# Altium PCB MCU_Boardfor traning.PcbDoc
Units mm, origin at the board's own origin, x right, y up, seen from the top; angles counter-clockwise.
Board outline 126.62 x 88.77 mm, 2 copper layers (Top Layer, Bottom Layer); 43 components, 56 nets, 187 pads, 13 vias.
Unrouted connection lines stored in the file: 3.
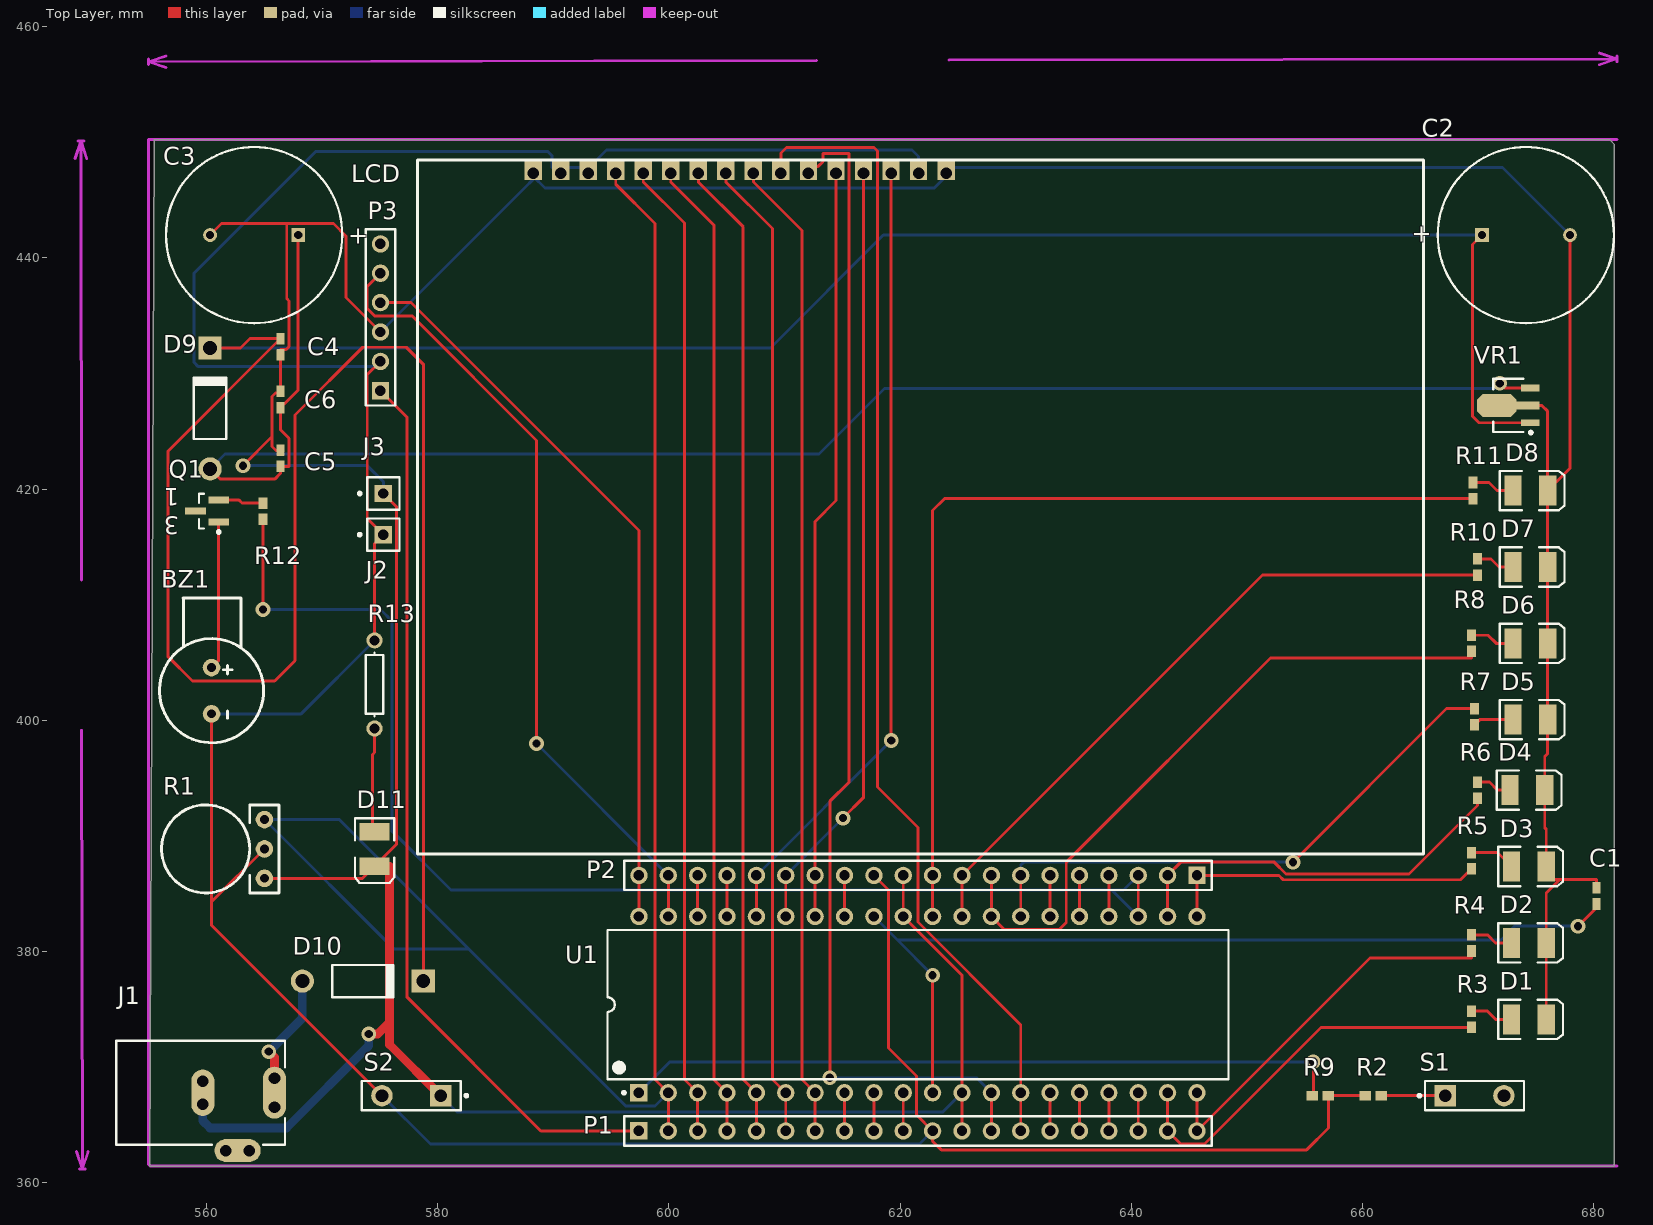
[diagram p0: Top Layer view]
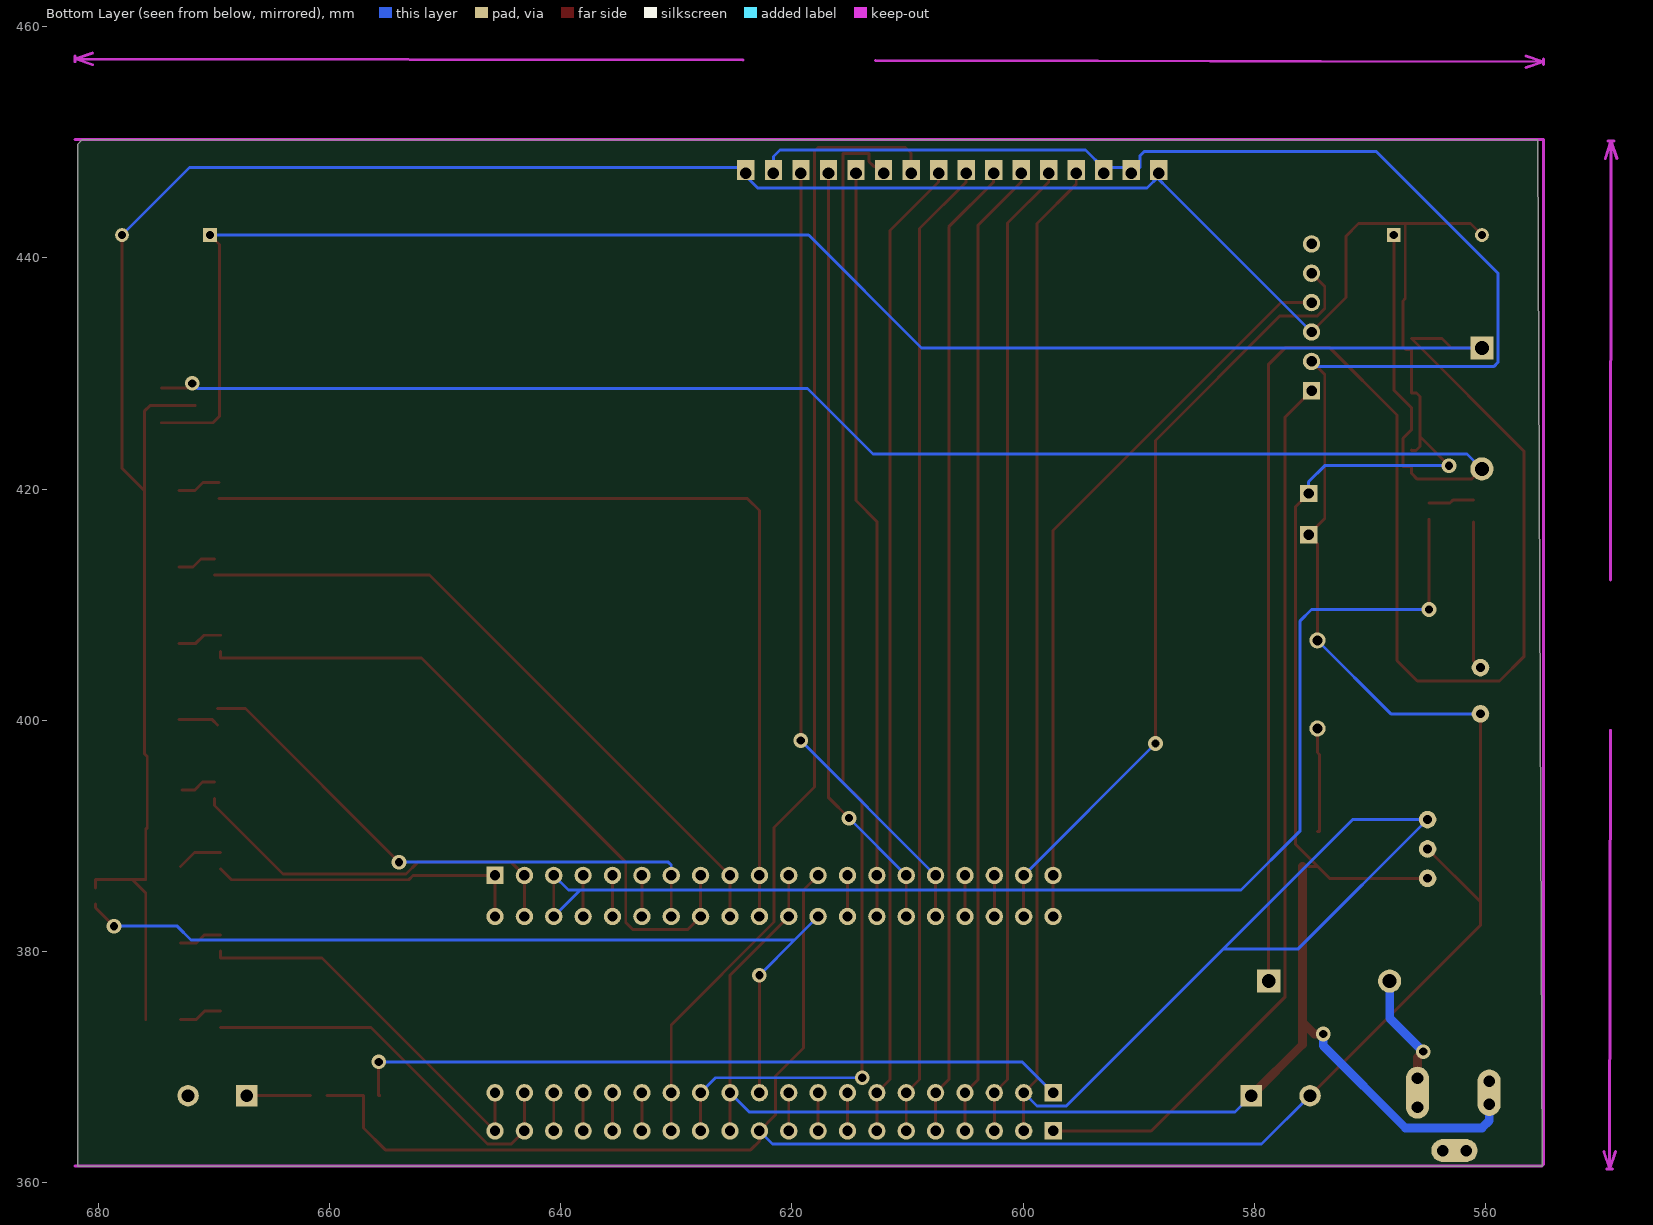
[diagram p1: Bottom Layer view, seen from below]

## Layer stack, top to bottom
Top Layer: signal copper 0.0356
Dielectric: dielectric 0.32, FR-4, Dk 4.8
Bottom Layer: signal copper 0.0356

## Board outline
555.498,450.215 681.355,450.215 681.736,449.834 681.736,361.442 555.117,361.442

## Design rules (kind name [scope] priority, off if disabled: settings)
Clearance [All] p1: gap=0.254
FabricationTestPointUsage TestPointUsage [All] p1: valid=0 allowmultiple=FALSE
FabricationTestpoint Testpoint [All] p1: side=3 testpointundercomponent=TRUE minsize=1.016 maxsize=2.54 preferedsize=1.524 minholesize=0 maxholesize=1.016 preferedholesize=0.813 testpointgrid=0.025 allowsidetop=TRUE allowsidebottom=TRUE usegrid=TRUE gridtolerance=0
HoleSize [All] p1: absolutevalues=TRUE maxlimit=5.08 minlimit=0.025 maxpercent=80.000 minpercent=20.000
MinimumSolderMaskSliver [All] p1: minsoldermaskwidth=0.127
PolygonConnect [All] p1: connectstyle=Relief reliefconductorwidth=0.254 reliefentries=4 polygonreliefangle="90 Angle" airgapwidth=0.254
RoutingVias [All] p1: holewidth=0.711 width=1.27 viastyle="Through Hole" minholewidth=0.711 minwidth=1.27 maxholewidth=0.711 maxwidth=1.27
SilkToSolderMaskClearance SilkscreenOverComponentPads [IsPad] p1: minsilkscreentomaskgap=0.038 clearancetoexposedcopper=TRUE
SolderMaskExpansion [All] p1: expansion=0.102
Width [All] p1: maxlimit=2.54 minlimit=0.254 preferedwidth=0.254
23 further rules are at their usual default settings.

## Classes and differential pairs
component class MCU: BZ1 C1 D1 D2 D3 D4 D5 D6 D7 D8 LCD P1 P2 Q1 R1 R2 R3 R4 R5 R6 R7 R8 R9 R10 R11 R12 S1 S2 U1
component class POWER: C2 C3 C4 C5 C6 D9 D10 D11 J1 J2 J3 P3 R13 VR1

## Components (designator, comment, footprint, x,y, rotation, side; value= is the part's Value field where it differs from the comment)
BZ1 "GT-0950RP3" Buzzer 560.451,400.558 r90 top
C1 "Cap" CAPC1005M 680.212,384.81 r270 top
C2 "Cap Pol1" RB7.6-15 674.116,441.96 r180 top
C3 "Cap Pol1" RB7.6-15 564.134,441.96 r0 top
C4 "Cap" CAPC1005M 566.42,432.308 r90 top
C5 "Cap" CAPC1005M 566.42,422.656 r270 top
C6 "Cap" CAPC1005M 566.42,427.736 r270 top
D1 "LED3" 3.5X2.8X1.9 674.37,374.142 r0 top
D2 "LED3" 3.5X2.8X1.9 674.37,380.746 r0 top
D3 "LED3" 3.5X2.8X1.9 674.37,387.35 r0 top
D4 "LED3" 3.5X2.8X1.9 674.243,393.954 r0 top
D5 "LED3" 3.5X2.8X1.9 674.497,400.05 r0 top
D6 "LED3" 3.5X2.8X1.9 674.497,406.654 r0 top
D7 "LED3" 3.5X2.8X1.9 674.497,413.258 r0 top
D8 "LED3" 3.5X2.8X1.9 674.497,419.862 r0 top
D9 "Diode 1N4001" DO-41 560.324,426.974 r90 top
D10 "Diode 1N4001" DO-41 573.532,377.444 r0 top
D11 "LED3" 3.5X2.8X1.9 574.548,388.874 r270 top
J1 "PWR2.5" KLD-0202 552.196,367.792 r0 top
J2 "Socket" PIN1 575.31,416.052 r90 top
J3 "Socket" PIN1 575.31,419.608 r90 top
LCD "LCD16x4" PCBComponent_1 588.264,447.294 r0 top
P1 "Header 20" HDR1X20 597.408,364.49 r0 top
P2 "Header 20" HDR1X20 645.668,386.588 r180 top
P3 "Header 6" HDR1X6 575.056,428.498 r90 top
Q1 "NPN" SOT23-3M 560.07,418.084 r180 top
R1 "Res pot" RPOT 565.023,386.334 r90 top
R2 "Res1" RESC1005M 660.908,367.538 r0 top
R3 "Res1" RESC1005M 669.417,374.142 r90 top
R4 "Res1" RESC1005M 669.417,380.746 r90 top
R5 "Res1" RESC1005M 669.417,387.858 r90 top
R6 "Res1" RESC1005M 669.925,393.954 r90 top
R7 "Res1" RESC1005M 669.671,400.304 r270 top
R8 "Res1" RESC1005M 669.417,406.654 r90 top
R9 "Res1" RESC1005M 656.336,367.538 r0 top
R10 "Res1" RESC1005M 669.925,413.258 r90 top
R11 "Res1" RESC1005M 669.544,419.862 r90 top
R12 "Res1" RESC1005M 564.896,418.084 r270 top
R13 "Res1" AXIAL-0.3 574.548,403.098 r270 top
S1 "SW-PB" SPST-2 669.671,367.538 r0 top
S2 "Reset" SPST-2 577.723,367.538 r180 top
U1 "PIC18F45K20-E/P" PDIP600-P40 621.538,375.412 r90 top
VR1 "Volt Reg" SOT89M 672.592,427.228 r180 top

## Footprints (in the part's own frame and the unit in brackets; to place one, negate y for a bottom-side part, rotate by r counter-clockwise, add the part's x,y. Pads: shape width x height; smd on the part's side, far side on the other; paste and mask are expansions set on the pad)
3.5X2.8X1.9 [mm] "SM LED; 2 C-Bend Leads; Body 3.5 x 2.8 x 1.9 mm, inc leads (LxWxH typ)"
  rect 1.5x2.6 smd: 1(-1.5,0) 2(1.5,0)
  silkscreen extent -2.65,-1.7 2.95,1.7
AXIAL-0.3 [mm] "Resistor; 2 Leads"
  round 1.4 hole 0.85: 1(-3.81,0) 2(3.81,0)
  silkscreen extent -2.77,-0.76 2.77,0.76
Buzzer [mil]
  round 60 hole 30: 1(0,0) 2(157.48,0)
  silkscreen extent -98,-177 395,177, body extent -95,-177 400,177, height 122
CAPC1005M [mm] "Chip Capacitor, Body 1.0x0.5mm, IPC Low Density"
  rect 1x0.7 smd: 1(-0.7,0) 2(0.7,0)
  body extent -0.55,-0.3 0.55,0.3, height 0.6
DO-41 [mm] "Diode, Axial; Body 5.2 x 2.7 mm (LxDia. max), Lead Dia. 0.86 mm (max)"
  round 2 hole 1.2: 1(-5.23,0)
  rect 2x2 hole 1.2: 2(5.23,0)
  silkscreen extent -2.65,-1.41 2.75,1.4
HDR1X6 [mm] "Connector; Header; 6 Position"
  rect 1.5x1.5 hole 0.9: 1(0,0)
  round 1.5 hole 0.9: 2(2.54,0) 3(5.08,0) 4(7.62,0) 5(10.16,0) 6(12.7,0)
  silkscreen extent -1.27,-1.27 13.97,1.27
HDR1X20 [mm] "Connector; Header; 20 Position"
  rect 1.5x1.5 hole 0.9: 1(0,0)
  round 1.5 hole 0.9: 2(2.54,0) 3(5.08,0) 4(7.62,0) 5(10.16,0) 6(12.7,0) 7(15.24,0) 8(17.78,0) 9(20.32,0) 10(22.86,0) 11(25.4,0) 12(27.94,0) 13(30.48,0) 14(33.02,0) 15(35.56,0) 16(38.1,0) 17(40.64,0) 18(43.18,0) 19(45.72,0) 20(48.26,0)
  silkscreen extent -1.27,-1.27 49.53,1.27
KLD-0202 [mm] "DC Power Jack, 2.5mm, KLD Series, PCB Mount"
  oval 2x4.5 all layers, no hole: 1(13.7,0)
  round 1.5 hole 1: 1A(13.7,-1.25) 1B(13.7,1.25) 2A(7.5,-1) 2B(7.5,1) 3A(9.5,-5) 3B(11.5,-5)
  oval 2x4 all layers, no hole: 2(7.5,0)
  oval 4x2 all layers, no hole: 3(10.5,-5)
  silkscreen extent 0,-4.5 14.6,4.5
PCBComponent_1 [mm]
  rect 1.5x1.7 hole 1 copper offset 0,0.3: 1(0,0) 2(2.381,0) 3(4.762,0) 4(7.143,0) 5(9.519,0) 6(11.899,0) 7(14.28,0) 8(16.661,0) 9(19.042,0) 10(21.423,0) 11(23.804,0) 12(26.185,0) 13(28.566,0) 14(30.947,0) 15(33.328,0) 16(35.709,0)
  silkscreen extent -10,-58.86 77,1.14
PDIP600-P40 [mm] "DIP, 40-Leads, Row Spacing 15.24mm, Pitch 2.54mm, Body 51.8x13.5mm"
  rect 1.5x1.5 hole 0.9: 1(-7.62,24.13)
  round 1.5 hole 0.9: 2(-7.62,21.59) 3(-7.62,19.05) 4(-7.62,16.51) 5(-7.62,13.97) 6(-7.62,11.43) 7(-7.62,8.89) 8(-7.62,6.35) 9(-7.62,3.81) 10(-7.62,1.27) 11(-7.62,-1.27) 12(-7.62,-3.81) 13(-7.62,-6.35) 14(-7.62,-8.89) 15(-7.62,-11.43) 16(-7.62,-13.97) 17(-7.62,-16.51) 18(-7.62,-19.05) 19(-7.62,-21.59) 20(-7.62,-24.13) 21(7.62,-24.13) 22(7.62,-21.59) 23(7.62,-19.05) 24(7.62,-16.51) 25(7.62,-13.97) 26(7.62,-11.43) 27(7.62,-8.89) 28(7.62,-6.35) 29(7.62,-3.81) 30(7.62,-1.27) 31(7.62,1.27) 32(7.62,3.81) 33(7.62,6.35) 34(7.62,8.89) 35(7.62,11.43) 36(7.62,13.97) 37(7.62,16.51) 38(7.62,19.05) 39(7.62,21.59) 40(7.62,24.13)
  silkscreen extent -7.74,-26.85 6.45,26.85, body extent -7.3,-26.85 7.3,26.85, height 6.35
PIN1 [mm] "Connector; Plug"
  rect 1.5x1.5 hole 0.9: 1(0,0)
  silkscreen extent -1.4,-1.4 1.4,2.17
RB7.6-15 [mm] "Polarized Capacitor (Radial); 2 Leads"
  rect 1.2x1.2 hole 0.7: 1(3.81,0)
  round 1.2 hole 0.7: 2(-3.81,0)
  silkscreen extent -7.62,-7.62 7.62,7.62
RESC1005M [mm] "Chip Resistor, Body 1.1x0.5mm, IPC Low Density"
  rect 1x0.8 smd: 1(-0.7,0) 2(0.7,0)
  body extent -0.55,-0.3 0.55,0.3, height 0.4
RPOT [mil]
  round 60 hole 30: 1(0,0) 2(100,0) 3(200,0)
  silkscreen extent -50,-50 250,350, body extent -50,-50 250,349, height 100
SOT23-3M [mm] "SOT23, 3-Leads, Body 2.9x1.3mm, Pitch 0.95mm, Lead Span 2.5mm, IPC Low Density"
  rect 1.8x0.6 smd: 1(-1,0.95) 2(-1,-0.95) 3(1,0)
  silkscreen extent -1.13,-1.5 0.7,1.92, body extent -0.7,-1.5 0.7,1.5, height 1.1
SOT89M [mm] "SOT89, 3-Leads, Body 4.5x2.4 mm, Pitch 1.5mm, Lead Span 4.1mm, IPC Low Density"
  rect 1.6x0.6 smd: 1(-1.9,1.5) 3(-1.9,-1.5)
  rect 2x0.7 smd: 2(-1.7,0)
  oct 3.4x2 smd: 2(1,0)
  silkscreen extent -2.07,-2.3 1.3,2.47, body extent -1.3,-2.3 1.3,2.3, height 1.6
SPST-2 [mm] "Circuit Breaker; 2 Leads"
  rect 1.85x1.85 hole 1.1: 1(-2.54,0)
  round 1.85 hole 1.1: 2(2.54,0)
  silkscreen extent -4.89,-1.27 4.28,1.27

## Part data
BZ1: library part Buzzer, "AUDIO MAGNETICXDCR"
C1 C4 C5 C6: "CAP CER 0.1uF 50V 0805"
C2 C3: "Polarized Capacitor (Radial)"
D1 D2 D3 D4 D5 D6 D7 D8 D11: "Typical BLUE SiC LED"
D9 D10: "1 Amp General Purpose Rectifier"
J1: "Low Voltage Power Supply Connector"
P1 P2: "Header, 20-Pin"
P3: "Header, 6-Pin"
Q1: "NPN Bipolar Transistor"
R1: library part "Res Tap", "Tapped Resistor"
R2 R3 R4 R5 R6 R7 R8 R9 R10 R11 R12: "Resistor 10k 5% 1/8W 8050"
R13: "Resistor"
S1: "Switch"
S2: library part SW-PB, "Switch"
U1: "Flash Microcontroller with 10-Bit A/D and nanoWatt Technology, 32K Flash, 40-Pin PDIP, Extended Temperature Range"
VR1: "Voltage Regulator"

## Via types
v1: diameter 1.27, hole 0.711, Top Layer to Bottom Layer, 13 vias

## Nets (pads, with @x,y where several pads share a name; then routed paths per layer and width w, separated by ;. In a path a pad name is that pad's centre, name@x,y a point inside that pad or via, vN(x,y) a via of type N, cw(c..) or ccw(c..) an arc to the next point about the centre after c; other vN are vias at no path point)
GND: C1.1 C2.2 C3.2 C4.1 C5.1 C6.1 D1.2 D2.2 D3.2 D4.2 D5.2 D6.2 D7.2 D8.2 D11.2 J1.2A J1.2B J3.1 LCD.1 LCD.16 P1.12 P2.11 P3.3 R1.1 S2.1 U1.12 U1.31 VR1.2 | length 419.2
  Top Layer w0.254: C3.2 561.315,442.951 566.953,442.951 ; v1(563.169,422.021) 565.683,424.536 ; R1.1 573.508,386.334 D11.2 ; C5.1 566.42,423.342 566.014,423.342 565.683,423.672 565.683,424.536 ; P3.3 572.084,436.55 572.084,441.858 570.992,442.951 566.953,442.951 ; J3.1 576.453,418.465 576.453,389.279 D11.2 ; D11.2@575.843,387.374 D11.2 ; P2.11 U1.31 625.348,377.952 U1.12 P1.12 ; VR1.2@671.592,427.228 674.292,427.228 675.488,427.228 675.997,426.719 D8.2 ; D1.2 D2.2 675.87,385.064 677.038,386.232 ; C2.2 677.926,421.791 D8.2 ; C1.1 680.212,386.232 677.038,386.232 ; 565.683,424.536 565.683,427.99 565.988,428.295 566.42,428.295 C6.1 C4.1 566.42,432.054 566.903,432.054 567.157,432.308 567.157,436.27 566.953,436.474 566.953,442.951 ; D8.2 D7.2 D6.2 D5.2 675.997,397.129 675.743,396.875 D4.2 675.743,390.703 675.87,390.576 D3.2 675.87,386.232 677.038,386.232
  Top Layer w0.762: v1(574.04,372.872) 574.827,372.872 575.843,373.888 ; D11.2@575.843,387.374 575.843,373.888 ; S2.1 575.843,371.958 575.843,373.888
  Bottom Layer w0.254: v1(563.169,422.021) 573.913,422.021 575.31,420.624 J3.1 ; P3.3 587.502,446.024 588.264,446.786 LCD.1@588.264,447.04 ; S2.1 581.672,366.129 623.685,366.129 U1.12 ; LCD.1@588.264,447.802 LCD.1@588.264,447.04 ; C2.2 672.084,447.802 623.973,447.802 623.973,447.04 622.957,446.024 589.28,446.024 LCD.1@588.264,447.04
  Bottom Layer w0.762: J1.2A 559.696,365.372 560.324,364.744 566.928,364.744 574.04,371.856 v1(574.04,372.872)
NetBZ1_2: BZ1.2 Q1.1 | length 12.8
  Top Layer w0.254: BZ1.2 561.07,405.177 Q1.1
NetC1_2: C1.2 U1.11 U1.32 | length 79.3
  Top Layer w0.254: U1.11 v1(622.808,377.952) ; v1(678.612,382.194) 680.212,383.794 C1.2
  Bottom Layer w0.254: U1.32 619.76,381 ; v1(622.808,377.952) 619.76,381 ; v1(678.612,382.194) 673.151,382.194 671.957,381 619.76,381
NetC2_1: C2.1 C4.2 D9.2 D10.2 VR1.1 | length 274.5
  Top Layer w0.254: D9.2 562.966,432.204 563.77,433.008 C4.2 556.666,423.254 556.666,405.536 558.8,403.403 565.912,403.403 567.665,405.155 567.665,426.39 573.532,432.257 577.291,432.257 578.762,430.786 D10.2 ; C2.1 669.493,441.147 669.493,426.287 670.052,425.728 VR1.1
  Bottom Layer w0.254: D9.2 608.785,432.204 618.541,441.96 C2.1
NetC3_1: C3.1 C5.2 C6.2 D9.1 VR1.3 | length 146.4
  Top Layer w0.254: D9.1 561.215,420.853 565.912,420.853 566.42,421.361 C5.2@566.42,421.945 ; C5.2 C5.2@566.42,421.945 ; C3.1 567.944,428.56 C6.2 566.42,425.12 567.157,424.383 567.157,421.945 C5.2@566.42,421.945 ; v1(671.855,429.133) 672.26,428.728 VR1.3
  Bottom Layer w0.254: D9.1 561.617,423.037 612.978,423.037 618.642,428.701 671.424,428.701 v1(671.855,429.133)
NetD1_1: D1.1 R3.2 | length 3.7
  Top Layer w0.254: R3.2 670.789,374.842 671.489,374.142 D1.1
NetD2_1: D2.1 R4.2 | length 3.7
  Top Layer w0.254: R4.2 670.789,381.446 671.489,380.746 D2.1
NetD3_1: D3.1 R5.2 | length 4
  Top Layer w0.254: R5.2 671.662,388.558 D3.1
NetD4_1: D4.1 R6.2 | length 3.1
  Top Layer w0.254: R6.2 670.966,394.654 671.666,393.954 D4.1
NetD5_1: D5.1 R7.2 | length 3.5
  Top Layer w0.254: R7.2 670.117,400.05 D5.1
NetD6_1: D6.1 R8.2 | length 3.9
  Top Layer w0.254: R8.2 670.839,407.354 671.539,406.654 D6.1
NetD7_1: D7.1 R10.2 | length 3.4
  Top Layer w0.254: R10.2 671.093,413.958 671.793,413.258 D7.1
NetD8_1: D8.1 R11.2 | length 3.7
  Top Layer w0.254: R11.2 670.916,420.562 671.616,419.862 D8.1
NetD10_1: D10.1 J1.1A J1.1B | length 9.8
  Top Layer w0.762: v1(565.404,371.348) 565.896,370.856 J1.1B
  Bottom Layer w0.762: v1(565.404,371.348) 568.302,374.246 D10.1
NetD11_1: D11.1 R13.2 | length 9.1
  Top Layer w0.254: D11.1 574.388,390.374 574.388,397.044 574.548,397.205 R13.2
NetJ1_3A: J1.3A J1.3B
NetLCD_4: LCD.4 P1.2 R1.3 U1.2 | length 153.1
  Top Layer w0.254: LCD.4@595.407,447.802 595.407,446.349 598.805,442.951 598.805,368.935 U1.2 P1.2
  Bottom Layer w0.254: U1.2 598.805,366.649 596.265,366.649 582.676,380.238 ; 582.676,380.238 571.5,391.414 R1.3 576.199,380.238 582.676,380.238
NetLCD_5: LCD.5 P1.3 U1.3 | length 85.3
  Top Layer w0.254: LCD.5@597.783,447.802 597.783,446.557 601.345,442.995 601.345,368.935 U1.3 P1.3
NetLCD_6: LCD.6 P1.4 U1.4 | length 85.3
  Top Layer w0.254: LCD.6@600.163,447.802 600.163,446.557 603.885,442.836 603.885,368.935 U1.4 P1.4
NetLCD_7: LCD.7 P1.5 U1.5 | length 85.4
  Top Layer w0.254: LCD.7@602.544,447.802 602.544,446.557 606.425,442.677 606.425,368.935 U1.5 P1.5
NetLCD_8: LCD.8 P1.6 U1.6 | length 85.5
  Top Layer w0.254: LCD.8@604.925,447.802 604.925,446.557 608.965,442.517 608.965,368.935 U1.6 P1.6
NetLCD_9: LCD.9 P1.7 U1.7 | length 85.5
  Top Layer w0.254: LCD.9@607.306,447.802 607.306,446.557 611.505,442.358 611.505,368.935 U1.7 P1.7
NetLCD_10: LCD.10 P1.14 U1.14 | length 99.8
  Top Layer w0.254: LCD.10@609.687,447.802 609.687,449.047 610.182,449.541 617.728,449.541 618.033,449.236 618.033,394.233 621.538,390.728 621.538,382.549 630.428,373.659 U1.14 P1.14
NetLCD_11: LCD.11 P1.13 U1.13 | length 103
  Top Layer w0.254: LCD.11@612.068,447.802 612.068,447.904 612.912,447.904 613.318,448.31 613.318,449.033 615.594,449.033 615.594,394.665 613.918,392.989 v1(613.918,369.087) ; P1.13 U1.13
  Bottom Layer w0.254: v1(613.918,369.087) 626.593,369.087 U1.13
NetLCD_12: LCD.12 P2.14 U1.34 | length 65.5
  Top Layer w0.254: U1.34 P2.14 612.648,417.195 614.449,418.996 LCD.12@614.449,447.802
NetLCD_13: LCD.13 P2.15 U1.35 | length 67.6
  Top Layer w0.254: U1.35 P2.15 ; v1(615.061,391.541) 616.814,393.294 616.814,447.802 LCD.13@616.83,447.802
  Bottom Layer w0.254: P2.15 v1(615.061,391.541)
NetLCD_14: LCD.14 P2.16 U1.36 | length 69.6
  Top Layer w0.254: U1.36 P2.16 ; LCD.14@619.211,447.802 619.211,398.262 v1(619.227,398.247)
  Bottom Layer w0.254: P2.16 v1(619.227,398.247)
NetP1_1: P1.1 P3.1 | length 78.2
  Top Layer w0.254: P3.1 577.367,426.187 577.367,376.047 588.924,364.49 P1.1
NetP1_8: P1.8 U1.8 | length 3.3
  Top Layer w0.254: P1.8 U1.8
NetP1_9: P1.9 U1.9 | length 3.3
  Top Layer w0.254: P1.9 U1.9
NetP1_10: P1.10 U1.10 | length 3.3
  Top Layer w0.254: P1.10 U1.10
NetP1_15: P1.15 U1.15 | length 3.3
  Top Layer w0.254: P1.15 U1.15
NetP1_16: P1.16 U1.16 | length 3.3
  Top Layer w0.254: P1.16 U1.16
NetP1_17: P1.17 U1.17 | length 3.3
  Top Layer w0.254: P1.17 U1.17
NetP1_18: P1.18 U1.18 | length 3.3
  Top Layer w0.254: P1.18 U1.18
NetP1_19: P1.19 R3.1 U1.19 | length 34.2
  Top Layer w0.254: U1.19 P1.19 644.259,363.359 646.315,363.359 656.387,373.431 669.417,373.431 R3.1
NetP1_20: P1.20 R4.1 U1.20 | length 33.8
  Top Layer w0.254: U1.20 P1.20 660.629,379.451 669.417,379.451 R4.1
NetP2_1: P2.1 R5.1 U1.21 | length 27.9
  Top Layer w0.254: U1.21 P2.1 652.755,386.588 653.136,386.207 668.466,386.207 R5.1
NetP2_2: P2.2 R6.1 U1.22 | length 34.3
  Top Layer w0.254: U1.22 P2.2 644.271,387.731 652.348,387.731 653.364,386.715 664.007,386.715 669.925,392.633 R6.1
NetP2_3: P2.3 R12.2 U1.23 | length 111.5
  Top Layer w0.254: v1(564.896,409.575) R12.2 ; U1.23 P2.3
  Bottom Layer w0.254: v1(564.896,409.575) 575.056,409.575 576.072,408.559 576.072,390.398 581.152,385.318 638.302,385.318 ; U1.23 638.302,385.318 ; P2.3 639.318,385.318 638.302,385.318
NetP2_4: P2.4 U1.24 | length 3.6
  Top Layer w0.254: U1.24 P2.4
NetP2_5: P2.5 U1.25 | length 3.6
  Top Layer w0.254: U1.25 P2.5
NetP2_6: P2.6 U1.26 | length 3.6
  Top Layer w0.254: U1.26 P2.6
NetP2_7: P2.7 R7.1 U1.27 | length 49.3
  Top Layer w0.254: U1.27 P2.7 ; v1(653.974,387.731) 667.258,401.015 669.671,401.015 R7.1
  Bottom Layer w0.254: P2.7 630.428,387.477 630.682,387.731 v1(653.974,387.731)
NetP2_8: P2.8 R8.1 U1.28 | length 58.9
  Top Layer w0.254: P2.8 U1.28 629.031,381.889 633.73,381.889 634.365,382.524 634.365,387.731 652.018,405.384 669.417,405.384 R8.1
NetP2_9: P2.9 R10.1 U1.29 | length 58.9
  Top Layer w0.254: U1.29 P2.9 651.332,412.572 669.925,412.572 R10.1
NetP2_10: P2.10 R11.1 U1.30 | length 82.3
  Top Layer w0.254: U1.30 P2.10 622.808,418.146 623.824,419.162 R11.1
NetP2_13: P2.13 U1.33 | length 3.6
  Top Layer w0.254: U1.33 P2.13
NetP2_17: P2.17 U1.37 | length 3.6
  Top Layer w0.254: U1.37 P2.17
NetP2_18: P2.18 U1.38 | length 3.6
  Top Layer w0.254: U1.38 P2.18
NetP2_19: P2.19 P3.5 U1.39 | length 68.8
  Top Layer w0.254: P3.5 573.913,437.515 573.913,435.61 574.548,434.975 577.774,434.975 588.543,424.205 v1(588.543,397.993) ; U1.39 P2.19
  Bottom Layer w0.254: v1(588.543,397.993) P2.19
NetP2_20: P2.20 P3.4 U1.40 | length 63.9
  Top Layer w0.254: P3.4 577.698,436.118 597.408,416.408 P2.20 U1.40
NetQ1_2: Q1.2 R12.1 | length 3.9
  Top Layer w0.254: Q1.2 562.839,419.034 563.089,418.784 R12.1
NetR2_2: R2.2 S1.1 | length 5.5
  Top Layer w0.254: R2.2 S1.1
NetR9_1: R9.1 U1.1 | length 62.4
  Top Layer w0.254: R9.1 655.726,367.538 v1(655.726,370.459)
  Bottom Layer w0.254: U1.1 600.075,370.459 v1(655.726,370.459)
VCC: BZ1.1 J2.1 LCD.2 LCD.3 LCD.15 P1.11 P2.12 P3.2 R1.2 R2.1 R9.2 R13.1 S2.2 | length 299.6
  Top Layer w0.254: BZ1.1 560.451,384.302 ; R1.2 560.451,384.302 ; R13.1 574.548,415.29 J2.1 573.913,417.449 573.913,429.895 P3.2 ; S2.2 560.451,382.27 560.451,384.302 ; P2.12 618.998,385.318 618.998,371.653 621.411,369.24 621.411,365.887 P1.11 622.808,363.601 623.558,362.851 655.154,362.851 657.047,364.744 R9.2@657.047,367.538 ; R9.2 R9.2@657.047,367.538 ; R2.1 R9.2@657.047,367.538
  Bottom Layer w0.254: BZ1.1 568.198,400.558 R13.1 ; P3.2 574.599,430.581 559.308,430.581 558.927,430.962 558.927,438.658 569.443,449.174 589.534,449.174 589.89,448.818 589.89,447.802 LCD.3@593.026,447.802 ; S2.2 579.374,363.347 621.665,363.347 P1.11 ; LCD.3 593.026,447.738 594.614,449.326 621.03,449.326 621.592,448.764 LCD.15 LCD.15@621.592,446.865
pads on no net: J1.1 J1.2 J1.3 P3.6 Q1.3 S1.2

## Keep-outs
Keep-Out Layer:
  lines w0.254: 548.642,448.563 549.148,450.088 ; 548.765,362.711 549.275,361.188 ; 548.894,450.088 549.402,450.088 ; 549.021,361.188 549.529,361.188 ; 549.202,412.138 549.148,450.088 ; 549.221,399.138 549.275,361.188 ; 549.658,448.565 549.148,450.088 ; 549.781,362.713 549.275,361.188 ; 554.99,361.569 554.99,450.215 681.99,450.215 ; 554.991,456.692 554.989,457.2 ; 555.117,361.442 681.99,361.442 ; 556.513,457.457 554.99,456.946 ; 556.515,456.441 554.99,456.946 ; 612.751,457.062 554.99,456.946 ; 624.229,457.084 681.99,457.2 ; 680.465,457.705 681.99,457.2 ; 680.467,456.689 681.99,457.2 ; 681.991,456.946 681.989,457.454
  text "127 (mm)" at 613.007,456.148 h1.52 r0.11
  text "88.9 (mm)" at 548.288,411.883 h1.52 r270.08

## Text inside footprints (layer, text, board x,y; h text height)
C2: Top Overlay "+" at 665.984,442.697 h1.5 r180
C3: Top Overlay "+" at 572.266,441.223 h1.5
J1: Mechanical 1 "Alert PCB fab to slot details" at 552.482,373.858 h0.3; Mechanical 1 "Assign keep-out area to slot" at 552.482,374.358 h0.3; Mechanical 1 "Mech 1 - Slot cut-out" at 552.482,373.358 h0.3; Mechanical 1 "Mech 2 - Clearance, move to internal plane if present" at 552.482,372.858 h0.3
Q1: Top Overlay "3" at 557.649,417.617 h1.5 r180; Top Overlay "1" at 557.649,420.063 h1.5 r180